# EAGLE board lcdconnector1 (EAGLE 6.1)
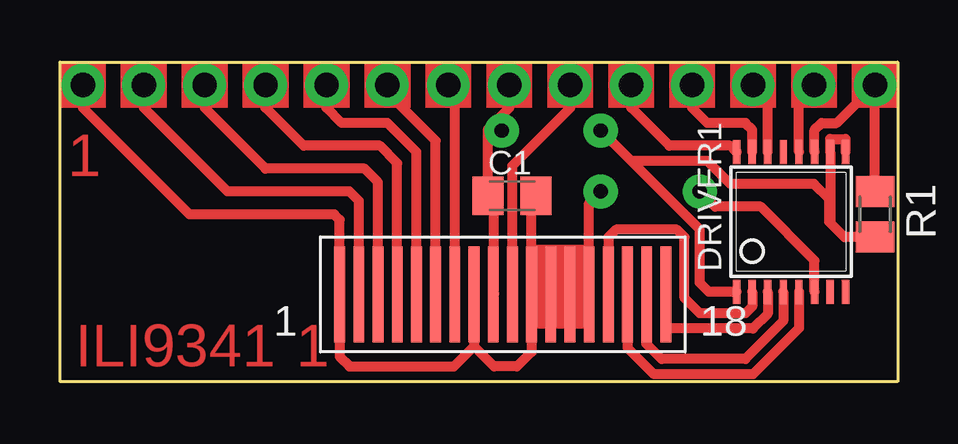
[diagram p0: board, top side]
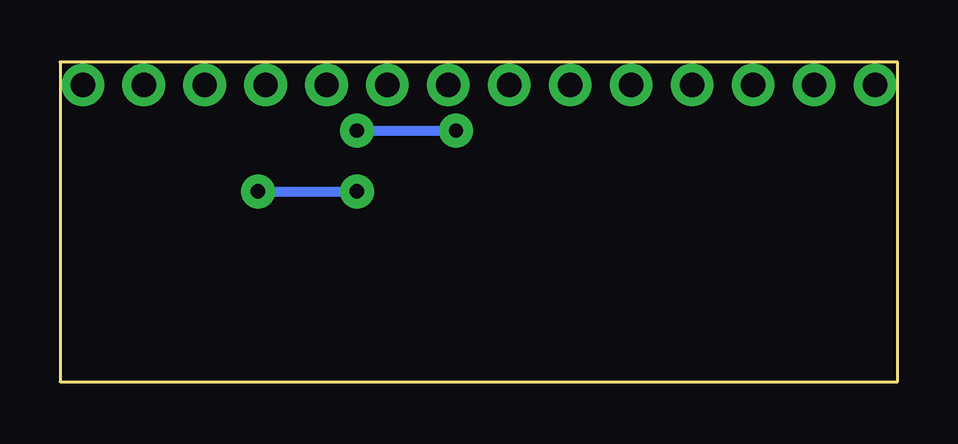
[diagram p1: board, bottom side, seen from below]

Size 34.93 x 13.34 mm. Coordinates in mm from the lower left corner, seen from the top.
Outline: 34.91,0 34.91,13.32 0,13.32
Outline: 34.91,0 34.93,0 34.93,13.34 0,13.34 0,13.32
Outline: 34.91,0 0,0 0,13.32
Copper layers (1*16): Top 0.035mm / dielectric 1.5mm / Bottom 0.035mm
Design rules: minimum track width 10mil, minimum drill 24mil, track to track 8mil, track to pad 8mil, pad to pad 8mil, via to via 8mil, smd to smd 8mil, copper to edge 40mil, drill to drill 8mil, minimum pad ring 10mil, minimum via ring 8mil, stop-mask expansion 4mil, vias tented up to drill 0mil, thermal gap 10mil
Net classes: 1 power: width 0.254 mm

## Footprints (pad centres in the part's own frame; a part is rotated, then mirrored left to right if it is on the bottom)
C0805K = smd 1.3 x 1.6: 1 -1,0; 2 1,0
TJCTM24024-PINS = smd 0.45 x 4: CS -8,-0.8; D/C -8.8,-0.8; GND -11.2,-0.8; GND2 -5.6,-0.8; GND3 -3.2,-0.8; GND4 -2.4,-0.8; GND5 -1.6,-0.8; GND6 -0.8,-0.8; LED -4,-0.8; RESET -10.4,-0.8; SCK -9.6,-0.8; SDI -7.2,-0.8; SDO -6.4,-0.8; VCC3.3V -4.8,-0.8; XN 1.6,-0.8; XP 0,-0.8; YN 0.8,-0.8; YP 2.4,-0.8
XPT2046 = smd 0.305 x 0.991: 1 -8.625,-1.648; 2 -7.975,-1.648; 3 -7.325,-1.648; 4 -6.675,-1.648; 5 -6.025,-1.648; 6 -5.375,-1.648; 7 -4.725,-1.648; 8 -4.075,-1.648; 9 -4.075,4.188; 10 -4.725,4.188; 11 -5.375,4.188; 12 -6.025,4.188; 13 -6.675,4.188; 14 -7.325,4.188; 15 -7.975,4.188; 16 -8.625,4.188
1X14-CB = drill 1.016 pad 1.778: 1 -16.51,0; 2 -13.97,0; 3 -11.43,0; 4 -8.89,0; 5 -6.35,0; 6 -3.81,0; 7 -1.27,0; 8 1.27,0; 9 3.81,0; 10 6.35,0; 11 8.89,0; 12 11.43,0; 13 13.97,0; 14 16.51,0
M0805 = smd 1.3 x 1.6: 1 -0.95,0; 2 0.95,0

## Placement (x,y rotation side)
C1  100nF  [C0805K]  18.85,7.76 0 top
CONNECTOR1  TJCTM24024-PINS  [TJCTM24024-PINS]  22.86,4.45 0 top
DRIVER1  XPT2046  [XPT2046]  36.83,5.4 0 top
JP1  [1X14-CB]  17.46,12.38 0 top
R1  10K  [M0805]  33.97,6.98 270 top

## Library data of the parts
C1 R1 = rcl
CONNECTOR1 DRIVER1 = uradmonitor
JP1 = adafruit

## Nets
N$1: CONNECTOR1.XP DRIVER1.2
N$2: CONNECTOR1.YP DRIVER1.3
N$3: CONNECTOR1.XN DRIVER1.4
N$4: CONNECTOR1.YN DRIVER1.5
N$5: C1.2 CONNECTOR1.GND CONNECTOR1.GND2 CONNECTOR1.GND3 CONNECTOR1.GND4 CONNECTOR1.GND5 CONNECTOR1.GND6 DRIVER1.6 JP1.1
N$11: CONNECTOR1.CS JP1.5
N$12: CONNECTOR1.RESET JP1.2
N$13: CONNECTOR1.D/C JP1.4
N$14: CONNECTOR1.SDI JP1.6
N$15: CONNECTOR1.SCK JP1.3
N$16: CONNECTOR1.LED JP1.9
N$17: CONNECTOR1.SDO JP1.7
N$18: DRIVER1.16 JP1.10
N$19: DRIVER1.15 JP1.11
N$20: DRIVER1.14 JP1.12
N$21: DRIVER1.12 JP1.13
N$22: DRIVER1.11 JP1.14 R1.1
N$23: C1.1 CONNECTOR1.VCC3.3V DRIVER1.1 DRIVER1.9 DRIVER1.10 JP1.8 R1.2

## Tracks (layer width: path | path; a pad name or v marks a point on that pad's centre or on a via)
N$1
  Top 0.406: DRIVER1.2 28.85,3.14 28.58,2.86 26.67,2.86 26.04,3.49 26.04,6.03 25.72,6.35 23.18,6.35 22.86,6.03 CONNECTOR1.XP
N$2
  Top 0.406: DRIVER1.3 29.5,2.84 28.89,2.22 25.4,2.22 25.26,2.36 CONNECTOR1.YP
N$3
  Top 0.406: DRIVER1.4 30.16,2.53 28.58,0.95 25.08,0.95 24.45,1.59 24.45,3.63 CONNECTOR1.XN
N$4
  Top 0.406: DRIVER1.5 30.8,2.23 28.89,0.32 24.76,0.32 23.66,1.42 CONNECTOR1.YN
N$5  (via drill 0.6 pad 1.42)
  Top 0.406: CONNECTOR1.GND3 CONNECTOR1.GND4 CONNECTOR1.GND5 CONNECTOR1.GND6 22.06,7.45 v22.54,7.94 | CONNECTOR1.GND3 19.66,1.24 19.05,0.64 18.1,0.64 17.26,1.47 | CONNECTOR1.GND2 17.26,1.47 | 17.26,1.47 16.42,0.64 12.07,0.64 11.66,1.04 CONNECTOR1.GND 11.66,6.76 11.43,6.98 5.4,6.98 0.95,11.43 JP1.1 | CONNECTOR1.GND3 19.66,7.57 C1.2 | DRIVER1.6 31.46,5.06 29.21,7.3 27.3,7.3 v26.67,7.94
  Bottom 0.406: v26.67,7.94 v22.54,7.94
N$6  (via drill 0.6)
  other vias: 0.95,12.38
N$7  (via drill 0.6)
  other vias: 3.49,12.38
N$8  (via drill 0.6)
  other vias: 6.03,12.38
N$9  (via drill 0.6)
  other vias: 8.57,12.38
N$10  (via drill 0.6)
  other vias: 11.11,12.38
N$11
  Top 0.406: CONNECTOR1.CS 14.86,9.59 13.65,10.79 11.75,10.79 11.11,11.43 JP1.5
N$12
  Top 0.406: CONNECTOR1.RESET 12.46,7.54 12.07,7.94 6.99,7.94 3.49,11.43 JP1.2
N$13
  Top 0.406: CONNECTOR1.D/C 14.06,9.12 13.33,9.84 10.16,9.84 8.57,11.43 JP1.4
N$14
  Top 0.406: CONNECTOR1.SDI 15.66,10.06 13.65,12.06 JP1.6
N$15
  Top 0.406: JP1.3 6.03,11.43 8.57,8.89 12.7,8.89 13.26,8.33 CONNECTOR1.SCK
N$16
  Top 0.406: CONNECTOR1.LED 18.86,9.02 21.27,11.43 JP1.9
N$17
  Top 0.406: CONNECTOR1.SDO 16.46,12.01 JP1.7
N$18
  Top 0.406: DRIVER1.16 27.94,9.84 25.4,9.84 23.81,11.43 JP1.10
N$19
  Top 0.406: DRIVER1.15 28.85,10.51 28.58,10.79 26.99,10.79 26.35,11.43 JP1.11
N$20
  Top 0.406: DRIVER1.14 29.5,11.77 JP1.12
N$21
  Top 0.406: DRIVER1.12 30.8,11.76 JP1.13
N$22
  Top 0.406: DRIVER1.11 31.46,10.5 31.75,10.79 32.38,10.79 JP1.14 R1.1
N$23  (via drill 0.6 pad 1.42)
  Top 0.406: DRIVER1.9 32.75,10.11 32.74,10.12 32.1,10.12 DRIVER1.10 32.1,6.63 | R1.2 32.7,6.04 32.1,6.63 | 32.1,6.63 32.07,6.67 32.07,7.62 31.43,8.26 27.94,8.26 26.99,9.21 23.81,9.21 | DRIVER1.1 27.05,3.75 26.67,4.13 26.67,6.35 23.81,9.21 | CONNECTOR1.VCC3.3V 18.1,3.68 18.1,7.51 C1.1 17.85,10.55 18.1,10.79 | 18.1,10.79 18.73,11.43 JP1.8 18.73,13.02 | 23.81,9.21 v22.54,10.48 | v18.42,10.48 18.1,10.79
  Bottom 0.406: v22.54,10.48 v18.42,10.48
N$24  (via drill 0.6)
  other vias: 13.65,12.38
N$25  (via drill 0.6)
  other vias: 16.19,12.38
N$26  (via drill 0.6)
  other vias: 18.73,12.38
N$27  (via drill 0.6)
  other vias: 21.27,12.38
N$28  (via drill 0.6)
  other vias: 23.81,12.38
N$29  (via drill 0.6)
  other vias: 26.35,12.38
N$30  (via drill 0.6)
  other vias: 28.89,12.38
N$31  (via drill 0.6)
  other vias: 31.43,12.38
N$32  (via drill 0.6)
  other vias: 33.97,12.38
(copper drawn outside any net)
  shapes: Top area x15

## Text on the board
Top: 1 | ILI9341 | 1